# Altium PCB PCB2.PcbDoc (part 3 of 3)
Units mil, origin at the board's own origin, x right, y up, seen from the top; angles counter-clockwise.
Board outline 9010 x 4600 mil, 2 copper layers (Top Layer, Bottom Layer); 234 components, 289 nets, 937 pads, 186 vias.
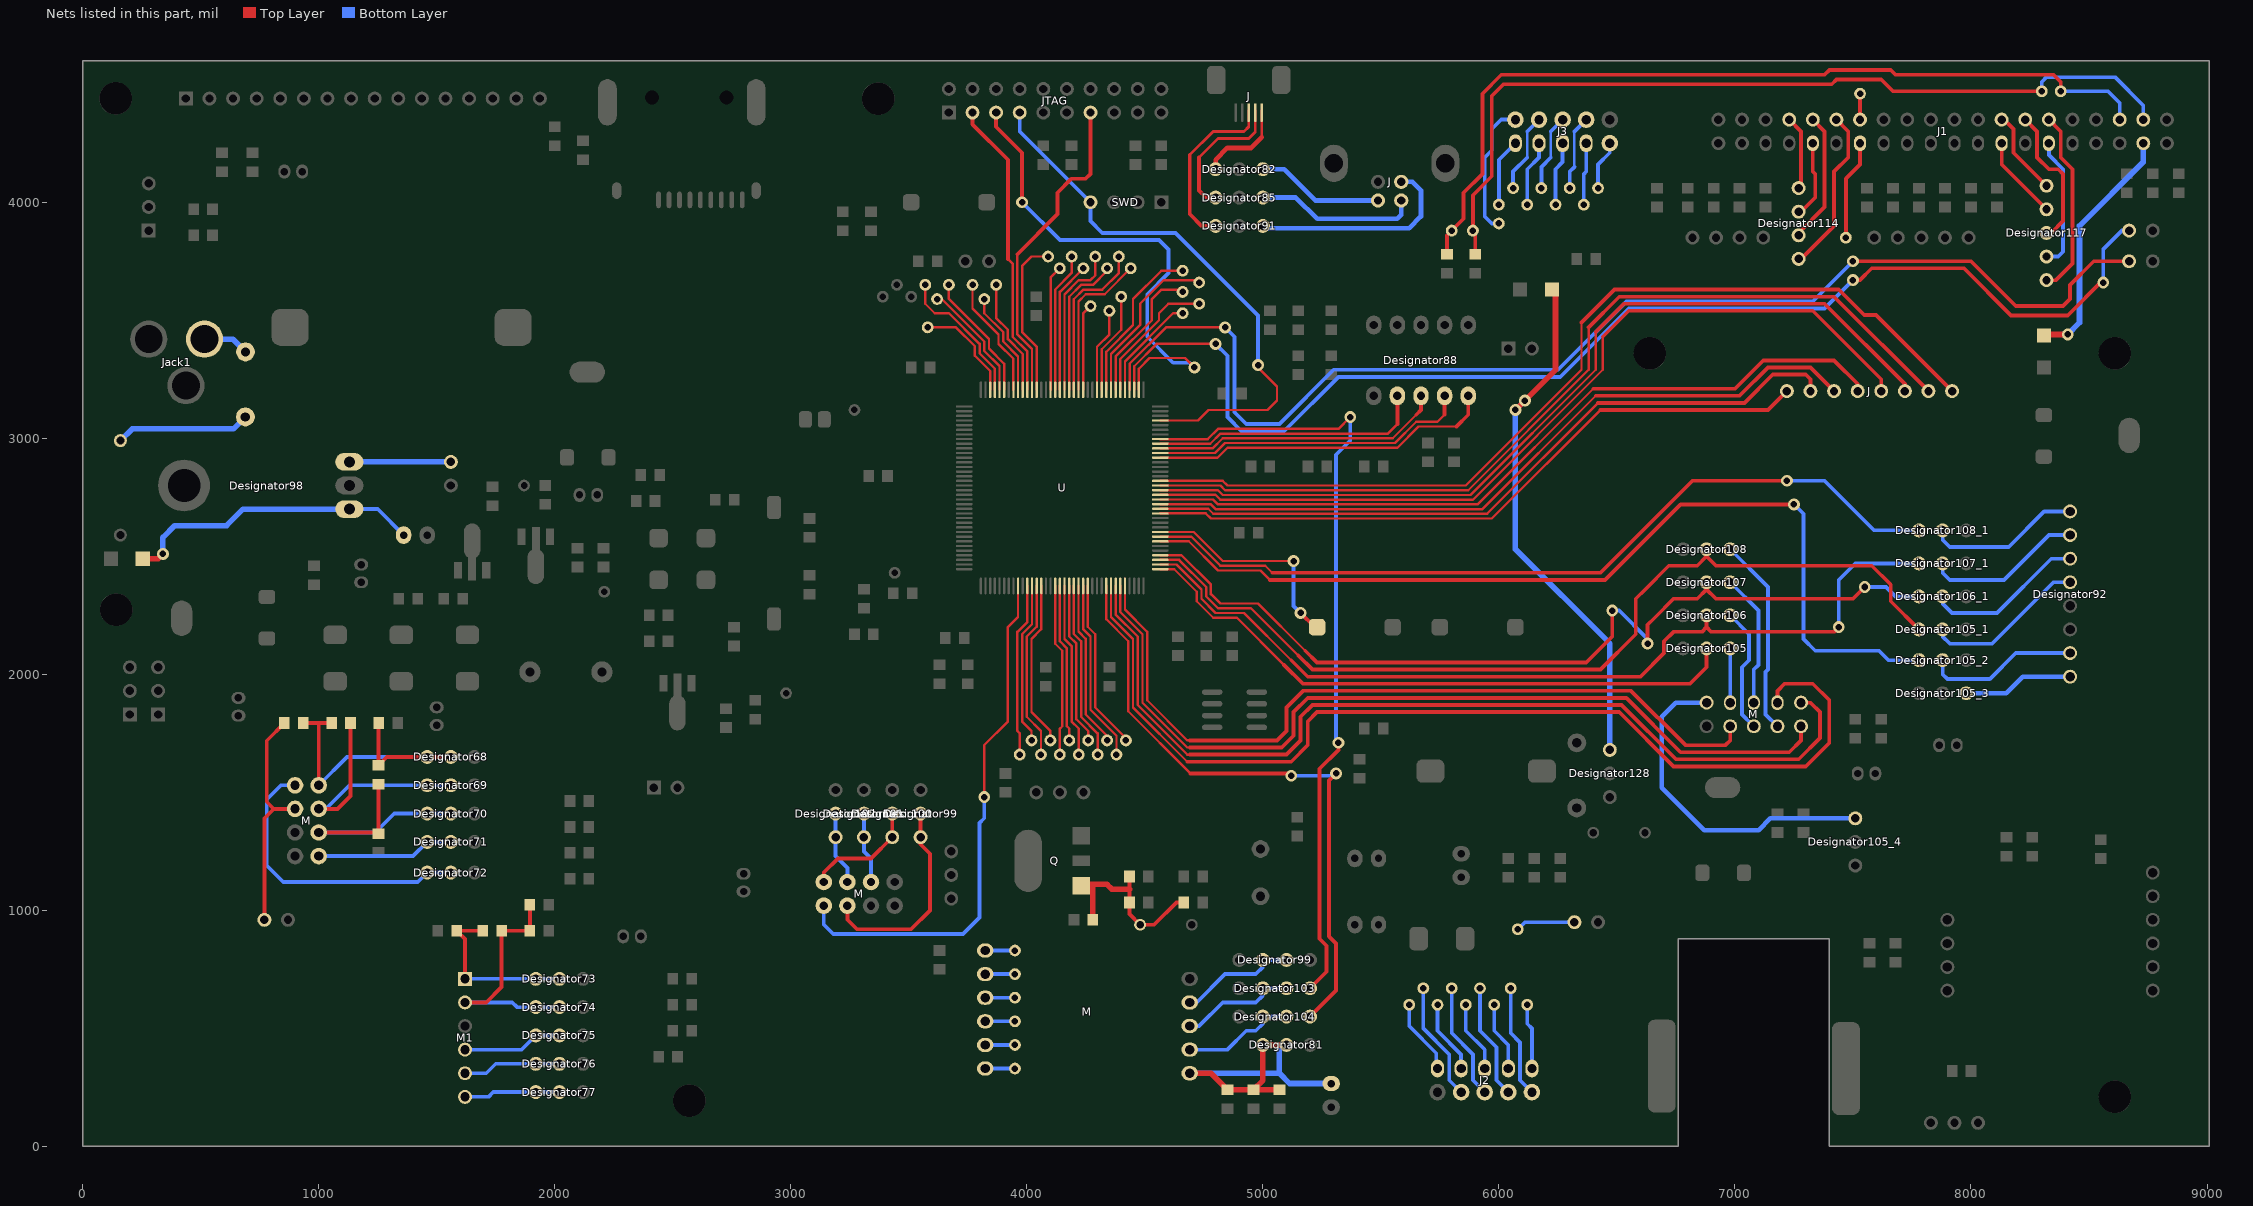
[diagram p3: the nets of this part, all layers, seen from the top]

## Via types
v1: diameter 50, hole 27.56, Top Layer to Bottom Layer, 186 vias

## Nets (pads, with @x,y where several pads share a name; then routed paths per layer and width w, separated by ;. In a path a pad name is that pad's centre, name@x,y a point inside that pad or via, vN(x,y) a via of type N, cw(c..) or ccw(c..) an arc to the next point about the centre after c; other vN are vias at no path point) (continued)
NewNet132: M.IRQ U.PC5 | length 2257.7
  Top Layer w10: v1(3820,1480) 3820,1700 3920,1800 3920,2200 3962.99,2242.99 U.PC5@3962.99,2374.65
  Bottom Layer w16: M.IRQ@3140,1020 3140,940 3180,900 3730,900 3800,970 3800,1370 3820,1390 v1(3820,1480)
NewNet133: pad.0@3970,1660 U.PB1 | length 736.3
  Top Layer w10: pad.0@3970,1660 3970,1750 3960,1760 3960,2180 4002.36,2222.36 U.PB1@4002.36,2374.65
NewNet134: pad.0@4020,1720 U.PB2 | length 688.6
  Top Layer w10: pad.0@4020,1720 4020,1760 3980,1800 3980,2170 4022.05,2212.05 U.PB2@4022.05,2374.65
NewNet135: pad.0@4060,1660 U.PF11 | length 756.8
  Top Layer w10: U.PF11@4041.73,2374.65 4041.73,2201.73 4000,2160 4000,1820 4060,1760 pad.0@4060,1660
NewNet136: pad.0@4100,1720 U.PF12 | length 704.9
  Top Layer w10: U.PF12@4061.42,2374.65 4061.42,2191.42 4020,2150 4020,1840 4100,1760 pad.0@4100,1720
NewNet137: pad.0@4140,1660 U.PF13 | length 731
  Top Layer w10: U.PF13@4120.47,2374.65 4120.47,2129.53 4150,2100 4150,1780 4140,1770 pad.0@4140,1660
NewNet138: pad.0@4180,1720 U.PF14 | length 671.1
  Top Layer w10: U.PF14@4140.16,2374.65 4140.16,2139.84 4170,2110 4170,1780 4180,1770 pad.0@4180,1720
NewNet139: pad.0@4220,1660 U.PF15 | length 739.6
  Top Layer w10: U.PF15@4159.84,2374.65 4159.84,2150.16 4190,2120 4190,1800 4220,1770 pad.0@4220,1660
NewNet140: pad.0@4260,1720 U.PG0 | length 688
  Top Layer w10: U.PG0@4179.53,2374.65 4179.53,2160.47 4210,2130 4210,1810 4260,1760 pad.0@4260,1720
NewNet141: pad.0@4300,1660 U.PG1 | length 756.4
  Top Layer w10: U.PG1@4199.21,2374.65 4199.21,2170.79 4230,2140 4230,1820 4300,1750 pad.0@4300,1660
NewNet142: pad.0@4340,1720 U.PE7 | length 704.8
  Top Layer w10: U.PE7@4218.9,2374.65 4218.9,2181.1 4250,2150 4250,1830 4340,1740 pad.0@4340,1720
NewNet143: pad.0@4380,1660 U.PE8 | length 773.2
  Top Layer w10: U.PE8@4238.58,2374.65 4238.58,2191.42 4270,2160 4270,1850 4380,1740 pad.0@4380,1660
NewNet144: pad.0@4420,1720 U.PE9 | length 725.8
  Top Layer w10: U.PE9@4258.27,2374.65 4258.27,2201.73 4290,2170 4290,1860 pad.0@4430,1720
NewNet145: Designator104.4 U.PE11 | length 2667.3
  Top Layer w10: U.PE11@4337.01,2374.65 4337.01,2232.99 4430,2140 4430,1843.94 4693.94,1580
  Top Layer w16: 4693.94,1580 5110,1580 v1(5120,1570) ; Designator104.4@5200,550 5310,660 5310,860 5280,890 5280,1550 v1(5310,1580)
  Bottom Layer w16: v1(5120,1570) 5300,1570 v1(5310,1580)
NewNet146: M.WOL U.PE12 | length 4372.2
  Top Layer w10: U.PE12@4356.69,2374.65 4356.69,2243.31 4450,2150 4450,1860 4680,1630
  Top Layer w16: 4680,1630 5120,1630 5190,1700 5190,1800 5230,1840 6510,1840 6740,1610 7300,1610 7400,1710 7400,1890 7330,1960 7210,1960 7180,1930 M.WOL@7180,1880
NewNet147: M.CLK U.PE13 | length 4005.1
  Top Layer w10: U.PE13@4376.38,2374.65 4376.38,2253.62 4470,2160 4470,1870 4680,1660 4690,1660
  Top Layer w16: 4690,1660 5100,1660 5160,1720 5160,1820 5210,1870 6520,1870 6750,1640 7270,1640 7360,1730 7360,1840 7320,1880 M.CLK@7280,1880
NewNet148: M.INT U.PE14 | length 3723.8
  Top Layer w10: U.PE14@4396.06,2374.65 4396.06,2263.94 4490,2170 4490,1880 4680,1690 4690,1690
  Top Layer w16: 4690,1690 5080,1690 5130,1740 5130,1840 5190,1900 6540,1900 6770,1670 7230,1670 7280,1720 M.INT@7280,1780
NewNet149: M.RST@6980,1780 U.PE15 | length 3403.6
  Top Layer w10: U.PE15@4415.75,2405.04 U.PE15@4415.75,2374.65 4415.75,2274.25 4510,2180 4510,1890 4680,1720 4690,1720
  Top Layer w16: 4690,1720 5060,1720 5100,1760 5100,1860 5170,1930 6560,1930 6790,1700 6960,1700 6980,1720 M.RST@6980,1780
NewNet150: Designator105.2 U.PB12-SPI2NSS | length 2648.2
  Top Layer w10: U.PB12-SPI2NSS@4565.35,2445.51 4624.49,2445.51 4720,2350 4720,2310 4790,2240 4890,2240 5090,2040
  Top Layer w16: 5090,2040 5170,1960 6810,1960 6880,2030 Designator105.2@6880,2110
NewNet151: Designator106.2 Designator107_1.1 U.PB13-SPI2-SCK | length 3836.7
  Top Layer w10: U.PB13-SPI2-SCK@4565.35,2465.2 4634.8,2465.2 4740,2360 4740,2320 4800,2260 4920,2260 5120,2060
  Top Layer w16: 5120,2060 5190,1990 6600,1990 6700,2090 6700,2140 6740,2180 6860,2180 6880,2200 ; Designator106.2@6880,2240 6880,2200 ; v1(7440,2200) 7420,2180 6900,2180 6880,2200
  Bottom Layer w16: v1(7440,2200) 7440,2400 7510,2470 Designator107_1.1@7780,2470
NewNet152: Designator106_1.1 Designator107.2 U.PB15-SPI2-MOSI | length 3877.6
  Top Layer w10: U.PB15-SPI2-MOSI@4565.35,2504.57 4655.43,2504.57 4780,2380 4780,2340 4820,2300 4980,2300 5180,2100
  Top Layer w16: 5180,2100 5230,2050 6370,2050 6480,2160 v1(6480,2270) ; v1(6630,2130) 6630,2210 6660,2240 6740,2320 6840,2320 6880,2360 ; Designator107.2@6880,2390 6880,2360 ; v1(7550,2370) 7500,2320 6920,2320 6880,2360
  Bottom Layer w16: v1(6480,2270) 6510,2270 6630,2150 v1(6630,2130) ; v1(7550,2370) 7640,2370 7680,2330 Designator106_1.1@7780,2330
NewNet153: Designator105_1.1 Designator108.2 U.PB14-SPI2-MISO | length 3916.7
  Top Layer w10: U.PB14-SPI2-MISO@4565.35,2484.88 4645.12,2484.88 4760,2370 4760,2330 4810,2280 4950,2280 5150,2080
  Top Layer w16: 5150,2080 5210,2020 6430,2020 6580,2170 6580,2180 6580,2320 6620,2360 6720,2460 6840,2460 6880,2500 ; Designator108.2@6880,2530 6880,2500 ; Designator105_1.1@7780,2190 7660,2310 7660,2380 7580,2460 6920,2460 6880,2500
NewNet154: Designator105_2.1 U.PD10 | length 3998.8
  Top Layer w10: U.PD10@4565.35,2563.62 4686.38,2563.62 4810,2440 4990,2440 5030,2400
  Top Layer w16: 5030,2400 6450,2400 6770,2720 v1(7250,2720)
  Bottom Layer w16: v1(7250,2720) 7290,2680 7290,2150 7340,2100 7610,2100 7650,2060 Designator105_2.1@7780,2060
NewNet155: Designator108_1.1 U.PD11 | length 3526.7
  Top Layer w10: U.PD11@4565.35,2583.31 4696.69,2583.31 4820,2460 5010,2460 5040,2430
  Top Layer w16: 5040,2430 6430,2430 6820,2820 v1(7220,2820)
  Bottom Layer w16: v1(7220,2820) 7380,2820 7590,2610 Designator108_1.1@7780,2610
NewNet156: KEY1.1 U.PD12 | length 942.9
  Top Layer w10: U.PD12@4565.35,2602.99 4707.01,2602.99 4830,2480 v1(5130,2480)
  Top Layer w16: v1(5160,2260) 5220,2200 KEY1.1@5230,2200
  Bottom Layer w16: v1(5130,2480) 5130,2290 v1(5160,2260)
NewNet157: J.Row1 U.PD14 | length 2887.3
  Top Layer w10: U.PD14@4565.35,2681.73 4758.27,2681.73 4780,2660 5970,2660 6430,3120
  Top Layer w16: 6430,3120 7140,3120 J.Row1@7220,3200
NewNet158: J.Row2 U.PD15 | length 3066.2
  Top Layer w10: U.PD15@4565.35,2701.42 4768.58,2701.42 4790,2680 5950,2680 6420,3150
  Top Layer w16: 6420,3150 7040,3150 7160,3270 7300,3270 7320,3250 J.Row2@7320,3200
NewNet159: J.Row3 U.PG2 | length 3153.3
  Top Layer w10: U.PG2@4565.35,2721.1 4778.9,2721.1 4800,2700 5930,2700 6410,3180
  Top Layer w16: 6410,3180 7020,3180 7140,3300 7320,3300 J.Row3@7420,3200
NewNet160: J.Row4 U.PG3 | length 3287.3
  Top Layer w10: U.PG3@4565.35,2740.79 4789.21,2740.79 4810,2720 5910,2720 6400,3210
  Top Layer w16: 6400,3210 7000,3210 7120,3330 7420,3330 7520,3230 J.Row4@7520,3200
NewNet161: J.Col1 U.PG4 | length 3646.6
  Top Layer w10: U.PG4@4565.35,2760.47 4799.53,2760.47 4820,2740 5890,2740 6440,3290 6440,3430
  Top Layer w16: 6440,3430 6550,3540 7330,3540 7620,3250 J.Col1@7620,3200
NewNet162: J.Col2 U.PG5 | length 3763.1
  Top Layer w10: U.PG5@4565.35,2780.16 4809.84,2780.16 4830,2760 5880,2760 6410,3290 6410,3450
  Top Layer w16: 6410,3450 6530,3570 7380,3570 7720,3230 J.Col2@7720,3200
NewNet163: J.Col3 U.PG6 | length 3873.6
  Top Layer w10: U.PG6@4565.35,2799.84 4820.16,2799.84 4840,2780 5870,2780 6380,3290 6380,3470
  Top Layer w16: 6380,3470 6510,3600 7420,3600 J.Col3@7820,3200
NewNet164: J.Col4 U.PG7 | length 4001.8
  Top Layer w10: U.PG7@4565.35,2819.53 4830.47,2819.53 4850,2800 5860,2800 6350,3290 6350,3490
  Top Layer w16: 6350,3490 6490,3630 7440,3630 7547.5,3522.5 7597.5,3522.5 J.Col4@7920,3200
NewNet165: Designator88.5 U.PC7 | length 1460.1
  Top Layer w10: U.PC7@4565.35,2917.95 4807.95,2917.95 4850,2960 5570,2960 5660,3050 5820,3050
  Top Layer w16: 5820,3050 5870,3100 Designator88.5@5870,3180
NewNet166: Designator88.6 U.PC8 | length 1351.9
  Top Layer w10: U.PC8@4565.35,2937.64 4797.64,2937.64 4840,2980 5560,2980 5650,3070 5740,3070 5770,3100
  Top Layer w16: 5770,3100 Designator88.6@5770,3180
NewNet167: Designator88.7 U.PC9 | length 1232
  Top Layer w10: U.PC9@4565.35,2957.32 4787.32,2957.32 4830,3000 5550,3000 5650,3100
  Top Layer w16: 5650,3100 5670,3120 Designator88.7@5670,3180
NewNet168: Designator88.8 U.PA8 | length 1159
  Top Layer w10: U.PA8@4565.35,2977.01 4777.01,2977.01 4820,3020 5530,3020 5570,3060
  Top Layer w16: 5570,3060 Designator88.8@5570,3180
NewNet169: Designator103.4 U.PA9-USART1-TX | length 3366.8
  Top Layer w10: U.PA9-USART1-TX@4565.35,2996.69 4766.69,2996.69 4810,3040 5320,3040 v1(5370,3090)
  Top Layer w16: Designator103.4@5200,670 5270,740 5270,850 5240,880 5240,1600 5320,1680 v1(5320,1710)
  Bottom Layer w16: v1(5320,1710) 5310,1720 5310,2930 5370,2990 v1(5370,3090)
NewNet170: JTAG.TMS-SWDIO SWD.SWDIO U.PA13-TMS-SWDIO | length 2382.8
  Top Layer w10: U.PA13-TMS-SWDIO@4565.35,3075.43 4725.43,3075.43 4770,3120 5020,3120 5060,3160 5060,3220 4980,3300 v1(4980,3310)
  Bottom Layer w16: JTAG.TMS-SWDIO@3970,4380 3970,4300 SWD.SWDIO@4270,4000 4270,3920 4320,3870 4630,3870 4980,3520 v1(4980,3310)
NewNet171: JTAG.TDI U.PA15-TDI | length 2149.5
  Top Layer w10: U.PA15-TDI@4474.8,3205.35 4474.8,3294.8 4520,3340 4670,3340 v1(4710,3300)
  Top Layer w16: JTAG.TDI@3870,4380 3870,4320 3980,4210 v1(3980,4000)
  Bottom Layer w16: v1(3980,4000) 4140,3840 4560,3840 4600,3800 4600,3700 4510,3610 4510,3430 4620,3320 4690,3320 v1(4710,3300)
NewNet172: Designator115.1 U.PC10-UART4-TX | length 5273.4
  Top Layer w10: U.PC10-UART4-TX@4455.12,3205.35 4455.12,3305.12 4550,3400 v1(4800,3400)
  Top Layer w16: v1(7500,3670) 7530,3670 7580,3720 7970,3720 8170,3520 8410,3520 8560,3670 v1(8560,3660)
  Bottom Layer w16: v1(4800,3400) 4850,3350 4850,3090 4910,3030 5090,3030 5320,3260 6260,3260 6550,3550 7380,3550 v1(7500,3670) ; v1(8560,3660) 8560,3800 8640,3880 Designator115.1@8670,3880
NewNet173: Designator116.1 U.PC11-UART4-RX | length 5244.3
  Top Layer w10: U.PC11-UART4-RX@4435.43,3205.35 4435.43,3315.43 4590,3470 v1(4840,3470)
  Top Layer w16: v1(7500,3750) 8000,3750 8190,3560 8390,3560 8420,3590 8420,3650 8520,3750 Designator116.1@8670,3750
  Bottom Layer w16: v1(4840,3470) 4880,3430 4880,3110 4930,3060 5070,3060 5300,3290 6250,3290 6540,3580 7330,3580 v1(7500,3750)
NewNet174: pad.0@4660,3530 U.PC12-UART5-TX | length 449.2
  Top Layer w10: U.PC12-UART5-TX@4415.75,3205.35 4415.75,3325.75 4620,3530 pad.0@4660,3530
NewNet175: pad.0@4730,3570 U.PD0 | length 579.1
  Top Layer w10: U.PD0@4396.06,3205.35 4396.06,3336.06 4560,3500 4560,3530 4600,3570 pad.0@4730,3570
NewNet176: pad.0@4660,3620 U.PD1 | length 594.8
  Top Layer w10: U.PD1@4376.38,3205.35 4376.38,3346.38 4530,3500 4530,3590 4570,3630 pad.0@4660,3630
NewNet177: pad.0@4730,3660 U.PD2-UART5-RX | length 707.1
  Top Layer w10: U.PD2-UART5-RX@4356.69,3205.35 4356.69,3356.69 4480,3480 4480,3570 4580,3670 pad.0@4730,3670
NewNet178: pad.0@4660,3710 U.PD3 | length 691.2
  Top Layer w10: U.PD3@4337.01,3205.35 4337.01,3367.01 4450,3480 4450,3590 4570,3710 pad.0@4660,3710
NewNet179: pad.0@4400,3600 U.PD4 | length 428.9
  Top Layer w10: U.PD4@4317.32,3205.35 4317.32,3377.32 4400,3460 pad.0@4400,3600
NewNet180: pad.0@4350,3540 U.PD5 | length 356.3
  Top Layer w10: U.PD5@4297.64,3205.35 4297.64,3387.64 4350,3440 pad.0@4350,3540
NewNet181: pad.0@4270,3560 U.PD6 | length 367.7
  Top Layer w10: U.PD6@4238.58,3205.35 4238.58,3528.58 pad.0@4270,3560
NewNet182: pad.0@4440,3720 U.PD7 | length 653.1
  Top Layer w10: U.PD7@4218.9,3205.35 4218.9,3578.9 4250,3610 4330,3610 pad.0@4440,3720
NewNet183: pad.0@4390,3770 U.PG9 | length 690.5
  Top Layer w10: U.PG9@4199.21,3205.35 4199.21,3589.21 4240,3630 4320,3630 4390,3700 pad.0@4390,3770
NewNet184: pad.0@4340,3720 U.PG10 | length 610.4
  Top Layer w10: U.PG10@4179.53,3205.35 4179.53,3599.53 4230,3650 4280,3650 4340,3710 pad.0@4340,3720
NewNet185: pad.0@4290,3770 U.PG11 | length 647.8
  Top Layer w10: U.PG11@4159.84,3205.35 4159.84,3609.84 4220,3670 4270,3670 4290,3690 pad.0@4290,3770
NewNet186: pad.0@4240,3720 U.PG12 | length 556
  Top Layer w10: U.PG12@4140.16,3205.35 4140.16,3620.16 pad.0@4240,3720
NewNet187: pad.0@4190,3770 U.PG13 | length 593.4
  Top Layer w10: U.PG13@4120.47,3205.35 4120.47,3630.47 4190,3700 pad.0@4190,3770
NewNet188: pad.0@4140,3720 U.PG14 | length 530.9
  Top Layer w10: U.PG14@4100.79,3205.35 4100.79,3680.79 pad.0@4140,3720
NewNet189: pad.0@4090,3770 U.PG15 | length 676.8
  Top Layer w10: U.PG15@4041.73,3205.35 4041.73,3388.27 3980,3450 3980,3730 4020,3770 pad.0@4090,3770
NewNet190: JTAG.TDO U.PB3-TDO | length 1363.9
  Top Layer w10: 3960,3780 3960,3440 4022.05,3377.95 U.PB3-TDO@4022.05,3205.35
  Top Layer w16: 3960,3780 4130,3950 4130,4040 4190,4100 4250,4100 4270,4120 JTAG.TDO@4270,4380
NewNet191: JTAG.TRST U.PB4-NJTRST | length 1270.9
  Top Layer w10: 3920,3760 3940,3740 3940,3430 4002.36,3367.64 U.PB4-NJTRST@4002.36,3205.35
  Top Layer w16: JTAG.TRST@3770,4380 3770,4330 3920,4180 3920,3760
NewNet192: pad.0@3870,3650 U.PB5 | length 491.3
  Top Layer w10: pad.0@3870,3650 3870,3510 3920,3460 3920,3420 3982.68,3357.32 U.PB5@3982.68,3205.35
NewNet193: pad.0@3820,3590 U.PB6 | length 443.9
  Top Layer w10: pad.0@3820,3590 3820,3530 3900,3450 3900,3410 3962.99,3347.01 U.PB6@3962.99,3205.35
NewNet194: pad.0@3770,3650 U.PB7 | length 516.4
  Top Layer w10: pad.0@3770,3650 3770,3550 3880,3440 3880,3400 3943.31,3336.69 U.PB7@3943.31,3205.35
NewNet195: pad.0@3670,3650 U.PB8-I2C1SCL | length 541.5
  Top Layer w10: pad.0@3670,3650 3670,3590 3840,3420 3840,3380 3903.94,3316.06 U.PB8-I2C1SCL@3903.94,3205.35
NewNet196: pad.0@3620,3590 U.PB9-I2C1SDA | length 505.8
  Top Layer w10: pad.0@3620,3590 3640,3590 3820,3410 3820,3370 3884.25,3305.75 U.PB9-I2C1SDA@3884.25,3205.35
NewNet197: pad.0@3570,3650 U.PE0 | length 601.8
  Top Layer w10: pad.0@3570,3650 3570,3570 3610,3530 3670,3530 3800,3400 3800,3360 3864.57,3295.43 U.PE0@3864.57,3205.35
NewNet198: pad.0@3580,3470 U.PE1 | length 444.7
  Top Layer w10: pad.0@3580,3470 3700,3470 3780,3390 3780,3350 3844.88,3285.12 U.PE1@3844.88,3205.35
NewNet199: C6.0@4280,960 Designator97.0 Q.B R21.0@4434.88,1033.86 R22.0@4434.88,1143.86 R24.0@4664.88,1033.86 | length 790.9
  Top Layer w16: R22.0@4434.88,1143.86 4434.88,1090 R21.0@4434.88,1033.86 4434.88,984.12 Designator97.0@4480,939 4539,939 4633.86,1033.86 R24.0@4664.88,1033.86
  Top Layer w24: Q.B@4250,1110 4280,1110 ; C6.0@4280,960 4280,1110 ; 4434.88,1090 4360,1090 4340,1110 4280,1110
NewNet200: Designator82.1 J.Vcc | length 389.4
  Top Layer w12: 4995.12,4275.12 J.Vcc@4995.12,4380 J.Vcc@4995.12,4390
  Top Layer w20: Designator82.1@4800,4140 4800,4180 4850,4230 4950,4230 4995.12,4275.12
NewNet201: Designator85.1 J.D-@4967.56,4380 | length 597
  Top Layer w12: 4730,4190 4810,4270 4940,4270 4967.56,4297.56 J.D-@4967.56,4380 J.D-@4967.56,4390
  Top Layer w16: 4730,4190 4730,4050 4760,4020 Designator85.1@4800,4020
NewNet202: Designator91.1 J.D+@4940,4380 | length 750.4
  Top Layer w12: 4690,4200 4790,4300 4920,4300 4940,4320 J.D+@4940,4380 J.D+@4940,4390
  Top Layer w16: 4690,4200 4690,3950 4740,3900 Designator91.1@4800,3900
NewNet203: Designator55.1 M.GPIO0 R14.0@854.88,1793.86 | length 983.9
  Top Layer w16: Designator55.1@770,960 770,1390 810,1430 ; R14.0@854.88,1793.86 780,1718.98 780,1460 810,1430 ; M.GPIO0@900,1430 810,1430
NewNet204: C.0@1254.88,1793.86 Designator68.1 Designator68.2 M.3.3V R14.0@934.88,1793.86 R15.0@1054.88,1793.86 R16.0@1253.86,1615.12 | length 1394.9
  Top Layer w16: R14.0@934.88,1793.86 996.14,1793.86 ; M.3.3V@1000,1530 1000,1790 996.14,1793.86 ; R15.0@1054.88,1793.86 996.14,1793.86 ; C.0@1254.88,1793.86 1253.86,1792.83 R16.0@1253.86,1615.12 1288.74,1650 Designator68.1@1460,1650 Designator68.2@1560,1650
  Bottom Layer w16: M.3.3V@1000,1530 1120,1650 Designator68.1@1460,1650
NewNet205: Designator69.1 Designator69.2 M.RST@1000,1430 R15.0@1134.88,1793.86 | length 1068
  Top Layer w16: M.RST@1000,1430 1080,1430 1134.88,1484.88 R15.0@1134.88,1793.86
  Bottom Layer w16: M.RST@1000,1430 1030,1430 1130,1530 1350,1530 Designator69.1@1460,1530 Designator69.2@1560,1530
NewNet206: Designator70.1 Designator70.2 M.CH_PD R16.0@1253.86,1535.12 R17.0@1253.86,1325.12 | length 1052.1
  Top Layer w16: M.CH_PD@1000,1330 1253.86,1330 R16.0@1253.86,1535.12
  Bottom Layer w16: M.CH_PD@1000,1330 1240,1330 1320,1410 Designator70.1@1460,1410 Designator70.2@1560,1410
NewNet207: 
NewNet208: Designator73.1 Designator73.2 M1.En R18.0@1584.88,913.86 R19.0@1694.88,913.86 | length 728.4
  Top Layer w16: M1.En@1620,710 1620,878.74 R18.0@1584.88,913.86 R19.0@1694.88,913.86
  Bottom Layer w16: M1.En@1620,710 Designator73.1@1920,710 Designator73.2@2020,710
NewNet209: C1.0@1894.88,913.86 C2.0@1894.88,1023.86 Designator74.1 Designator74.2 M1.5V R19.0@1774.88,913.86 | length 1059
  Top Layer w16: M1.5V@1620,610 1710,610 1774.88,674.88 R19.0@1774.88,913.86 C1.0@1894.88,913.86 C2.0@1894.88,1023.86
  Bottom Layer w16: M1.5V@1620,610 1820,610 1840,590 Designator74.1@1920,590 Designator74.2@2020,590
NewNet210: C3.0@4850,240 C4.0@4960,240 C5.0@5070,240 C14.2 Designator81.1 Designator81.2 M.Vcc | length 1553
  Top Layer w24: M.Vcc@4690,310 4780,310 C3.0@4850,240 C4.0@4960,240 ; C5.0@5070,240 C4.0@4960,240 ; Designator81.2@5100,430 Designator81.1@5000,430 5000,280 C4.0@4960,240
  Bottom Layer w24: M.Vcc@4690,310 5070,310 ; Designator81.1@5000,430 5070,430 ; Designator81.2@5100,430 5070,430 ; C14.2@5289.33,266.34 5113.66,266.34 5070,310 ; 5070,310 5070,430
NewNet211: Designator61.2 Designator98.3 | length 430
  Bottom Layer w24: Designator98.3@1130,2900 1260,2900 Designator61.2@1560,2900
NewNet212: Designator128.3 F1.2 | length 2248.9
  Top Layer w24: v1(6070,3120) v1(6110,3160) 6240,3290 6240,3480 6240,3615 F1.2@6225,3630
  Bottom Layer w24: v1(6110,3160) v1(6070,3120) 6070,2530 6470,2130 Designator128.3@6470,1680
NewNet213: F2.2 J1.5v@8730,4250 | length 1044.6
  Top Layer w24: F2.2@8310,3435 8315,3440 v1(8410,3440)
  Bottom Layer w24: v1(8410,3440) 8460,3490 8460,3900 8730,4170 J1.5v@8730,4250
NewNet214: Designator60.1 pad.0@6080,920 | length 252.4
  Bottom Layer w16: pad.0@6080,920 6110,950 Designator60.1@6320,950
NewNet215: Designator105_4.3 M.VCC3.3v | length 1430.1
  Bottom Layer w20: M.VCC3.3v@6880,1880 6750,1880 6690,1820 6690,1520 6870,1340 7100,1340 7150,1390 Designator105_4.3@7510,1390
NewNet216: Designator92.Vcc3.3V Designator105_3.3 | length 469
  Bottom Layer w20: Designator105_3.3@7980,1920 8150,1920 8220,1990 Designator92.Vcc3.3V@8420,1990
NewNet217: C37.2 Designator98.1 F3.2 | length 1278.6
  Top Layer w24: F3.2@255,2490 320,2490 v1(340,2510)
  Bottom Layer w16: Designator98.1@1130,2700 1250,2700 C37.2@1360,2590
  Bottom Layer w24: v1(340,2510) 340,2580 390,2630 610,2630 680,2700 Designator98.1@1130,2700
NewNet218: Designator89.K R.2 | length 571.2
  Bottom Layer w24: R.2@160,2990 210,3040 639.17,3040 Designator89.K@689.57,3090.4
NewNet219: Designator117.5 J1.GPIO22 | length 374.6
  Top Layer w16: J1.GPIO22@8130,4350 8140,4350 8180,4310 8180,4210 Designator117.5@8320,4070
  Bottom Layer w16: J1.GPIO22@8130,4340 J1.GPIO22@8130,4350
NewNet220: Designator117.4 J1.GPIO23 | length 358.7
  Top Layer w16: J1.GPIO23@8130,4250 8130,4160 Designator117.4@8320,3970
NewNet221: Designator117.3 J1.GPIO27 | length 610.4
  Top Layer w16: J1.GPIO27@8230,4350 8280,4300 8280,4190 8330,4140 8370,4140 8390,4120 8390,3920 8340,3870 Designator117.3@8320,3870
NewNet222: Designator117.2 J1.GPIO18 | length 573.1
  Top Layer w16: J1.GPIO18@8330,4240 J1.GPIO18@8330,4250
  Bottom Layer w16: Designator117.2@8320,3770 8370,3770 8390,3790 8390,4140 8330,4200 J1.GPIO18@8330,4250
NewNet223: Designator117.1 J1.GPIO17 | length 790.4
  Top Layer w16: Designator117.1@8320,3670 8360,3670 8430,3740 8430,4140 8380,4190 8380,4300 J1.GPIO17@8330,4350
NewNet224: Designator114.4 J1.GPIO13 | length 314.9
  Top Layer w16: J1.GPIO13@7230,4350 7280,4300 7280,4070 Designator114.4@7270,4060
NewNet225: Designator114.3 J1.GPIO12 | length 329
  Top Layer w16: Designator114.3@7270,3960 7280,3960 7340,4020 7340,4120 7330,4130 J1.GPIO12@7330,4250
NewNet226: Designator114.2 J1.GPIO6 | length 556.3
  Top Layer w16: Designator114.2@7270,3860 7270,3870 7380,3980 7380,4300 J1.GPIO6@7330,4350
NewNet227: Designator114.1 J1.GPIO5 | length 703.6
  Top Layer w16: Designator114.1@7270,3760 7280,3760 7420,3900 7420,4130 7480,4190 7480,4300 J1.GPIO5@7430,4350
NewNet228: Designator92.RST Designator105_2.2 | length 653.8
  Bottom Layer w16: Designator105_2.2@7880,2060 7880,2000 7900,1980 8080,1980 8190,2090 Designator92.RST@8420,2090
NewNet229: Designator101.1 Designator101.2 M.CE | length 302.4
  Bottom Layer w16: Designator101.2@3310,1410 Designator101.1@3310,1310 3310,1250 3340,1220 M.CE@3340,1120
NewNet230: Designator102.1 Designator102.2 M.SCK@3240,1120 | length 310.7
  Bottom Layer w16: Designator102.2@3190,1410 Designator102.1@3190,1310 3190,1230 3240,1180 M.SCK@3240,1120
NewNet231: Designator100.1 Designator100.2 M.MISO | length 492.1
  Top Layer w16: M.MISO@3140,1120 3140,1160 3200,1220 3340,1220 Designator100.1@3430,1310 Designator100.2@3430,1410
NewNet232: Designator99.1@3550,1310 Designator99.2@3550,1410 M.MOSI | length 906.3
  Top Layer w16: M.MOSI@3240,1020 3240,960 3280,920 3510,920 3590,1000 3590,1240 3550,1280 Designator99.1@3550,1310 Designator99.2@3550,1410 Designator99.2@3570,1410
NewNet233: Designator91.3 J.D+@5586.3,4086.3 | length 889.4
  Bottom Layer w20: Designator91.3@5010,3890 5620,3890 5670,3940 5670,4050 5633.7,4086.3 J.D+@5586.3,4086.3
NewNet234: Designator85.3 J.D-@5586.3,4007.56 | length 691.6
  Bottom Layer w20: Designator85.3@5000,4020 5140,4020 5230,3930 5570,3930 5586.3,3946.3 J.D-@5586.3,4007.56
NewNet235: Designator82.3 J.vcc@5487.87,4007.56 | length 542.7
  Bottom Layer w20: Designator82.3@5000,4140 5090,4140 5222.44,4007.56 J.vcc@5487.87,4007.56
NewNet236: J3.2 pad.0@6420,4060 | length 210.7
  Bottom Layer w16: pad.0@6420,4060 6420,4160 6470,4210 J3.2@6470,4250
NewNet237: J3.6 pad.0@6240,3990 | length 272.4
  Bottom Layer w16: pad.0@6240,3990 6240,4140 6270,4170 J3.6@6270,4250
NewNet238: J3.10 pad.0@6000,3990 | length 289
  Bottom Layer w16: pad.0@6000,3990 6000,4180 J3.10@6070,4250
NewNet239: J3.9 pad.0@6000,3910 | length 556.4
  Bottom Layer w16: pad.0@6000,3910 5970,3910 5940,3940 5940,4190 5970,4220 5970,4310 6010,4350 J3.9@6055,4350
NewNet240: J3.8 pad.0@6120,3990 | length 280.7
  Bottom Layer w16: pad.0@6120,3990 6120,4140 6170,4190 J3.8@6170,4250
NewNet241: J3.7 pad.0@6060,4060 | length 335.6
  Bottom Layer w10: 6120,4190 6120,4300
  Bottom Layer w16: pad.0@6060,4060 6060,4130 6120,4190 ; 6120,4300 J3.7@6170,4350
NewNet242: J3.5 pad.0@6180,4060 | length 327.3
  Bottom Layer w10: 6220,4190 6220,4300
  Bottom Layer w16: pad.0@6180,4060 6180,4150 6220,4190 ; 6220,4300 J3.5@6270,4350
NewNet243: J3.4 pad.0@6360,3990 | length 264.1
  Bottom Layer w16: pad.0@6360,3990 6360,4120 6370,4130 J3.4@6370,4250
NewNet244: J3.3 pad.0@6300,4060 | length 319
  Bottom Layer w10: 6320,4150 6320,4300
  Bottom Layer w16: pad.0@6300,4060 6300,4130 6320,4150 ; 6320,4300 J3.3@6370,4350
NewNet245: J2.5V pad.0@5620,600 | length 317.6
  Bottom Layer w16: pad.0@5620,600 5620,510 5735,395 J2.5V@5735,330
NewNet246: J2.6 pad.0@5860,600 | length 303.1
  Bottom Layer w16: pad.0@5860,600 5860,490 5940,410 J2.6@5940,330
NewNet247: J2.10 pad.0@6120,600 | length 278.3
  Bottom Layer w16: pad.0@6120,600 6120,520 6140,500 J2.10@6140,330
NewNet248: J2.9 pad.0@6050,670 | length 487.3
  Bottom Layer w16: pad.0@6050,680 pad.0@6050,670 6050,480 6090,440 6090,280 J2.9@6140,230
NewNet249: J2.8 pad.0@5980,600 | length 294.9
  Bottom Layer w16: pad.0@5980,600 5980,490 6040,430 J2.8@6040,330
NewNet250: J2.7 pad.0@5920,670 | length 489.7
  Bottom Layer w16: pad.0@5920,670 5920,490 5990,420 5990,280 J2.7@6040,230
NewNet251: J2.5 pad.0@5800,670 | length 498
  Bottom Layer w16: pad.0@5800,670 5800,480 5890,390 5890,280 J2.5@5940,230
NewNet252: J2.4 pad.0@5740,600 | length 315.6
  Bottom Layer w16: pad.0@5730,600 5740,590 5740,490 5840,390 J2.4@5840,330
NewNet253: J2.3.3V pad.0@5680,670 | length 506.3
  Bottom Layer w16: pad.0@5680,670 5680,500 5790,390 5790,280 J2.3.3V@5840,230
NewNet254: Designator89.A Jack1.1 | length 196.1
  Bottom Layer w24: Jack1.1@516.22,3420 636,3420 Designator89.A@690,3366
NewNet255: Designator92.MISO Designator105_1.2 | length 690.1
  Bottom Layer w16: Designator105_1.2@7880,2190 7880,2160 7910,2130 8090,2130 8350,2390 Designator92.MISO@8420,2390
NewNet256: Designator92.MOSI Designator106_1.2 | length 681.8
  Bottom Layer w16: Designator106_1.2@7880,2330 7880,2300 7920,2260 8110,2260 8340,2490 Designator92.MOSI@8420,2490
NewNet257: Designator92.SCK Designator107_1.2 | length 681.1
  Bottom Layer w16: Designator107_1.2@7880,2470 7880,2430 7910,2400 8140,2400 8330,2590 Designator92.SCK@8420,2590 Designator92.SCK@8430,2590
NewNet258: Designator92.CS Designator108_1.2 | length 654.6
  Bottom Layer w16: Designator108_1.2@7880,2610 7880,2570 7910,2540 8160,2540 8310,2690 Designator92.CS@8420,2690
NewNet259: Designator99.2@5000,790 Designator99.3@5100,790 M.TXD@4690,610 | length 502.1
  Bottom Layer w16: M.TXD@4690,610 4720,610 4840,730 4970,730 5000,760 Designator99.2@5000,790 Designator99.3@5100,790
NewNet260: Designator103.2 Designator103.3 M.RXD@4690,510 | length 503.8
  Bottom Layer w16: M.RXD@4680,510 M.RXD@4690,510 4730,510 4830,610 4970,610 5000,640 Designator103.2@5000,670 Designator103.3@5100,670
NewNet261: Designator104.2 Designator104.3 M.RST@4690,410 | length 505.6
  Bottom Layer w16: M.RST@4690,410 4850,410 4930,490 4970,490 5000,520 Designator104.2@5000,550 Designator104.3@5100,550 Designator104.3@5100,530
NewNet262: M.DTR pad.0@3950,330 | length 126.1
  Bottom Layer w16: M.DTR@3823.86,330 pad.0@3950,330
NewNet263: M.0@3823.86,430 pad.0@3950,430 | length 126.1
  Bottom Layer w16: M.0@3823.86,430 pad.0@3950,430
NewNet264: M.0@3823.86,530 pad.0@3950,530 | length 126.1
  Bottom Layer w16: M.0@3823.86,530 pad.0@3950,530
NewNet265: M.0@3823.86,630 pad.0@3950,630 | length 126.1
  Bottom Layer w16: M.0@3823.86,630 pad.0@3950,630
NewNet266: M.0@3823.86,730 pad.0@3950,730 | length 126.1
  Bottom Layer w16: M.0@3823.86,730 pad.0@3950,730
NewNet267: M.0@3823.86,830 pad.0@3950,830 | length 126.1
  Bottom Layer w16: M.0@3823.86,830 pad.0@3950,830
NewNet268: Designator108.3 M.SO | length 841.1
  Bottom Layer w16: Designator108.3@6980,2530 7140,2370 7140,2020 7130,2010 7130,1830 M.SO@7180,1780
NewNet269: Designator107.3 M.SI | length 568
  Bottom Layer w16: Designator107.3@6980,2390 7100,2270 7100,2040 7080,2020 M.SI@7080,1880
NewNet270: Designator106.3 M.SCK@7080,1780 | length 536.3
  Bottom Layer w16: Designator106.3@6980,2250 7060,2170 7060,2060 7030,2030 7030,1830 M.SCK@7080,1780
NewNet271: Designator105.3 M.CS | length 230
  Bottom Layer w16: M.CS@6980,1880 Designator105.3@6980,2110
NewNet272: Designator77.1 Designator77.2 M1.State | length 448.3
  Top Layer w16: M1.State@1620,190 M1.State@1620,210
  Bottom Layer w16: M1.State@1620,210 1720,210 1740,230 Designator77.1@1920,230 Designator77.2@2020,230 Designator77.2@2020,210
NewNet273: Designator76.1 Designator76.2 M1.RXD | length 416.6
  Bottom Layer w16: M1.RXD@1620,310 1710,310 1750,350 Designator76.1@1920,350 Designator76.2@2020,350
NewNet274: Designator75.1 Designator75.2 M1.TXD | length 444.9
  Bottom Layer w16: M1.TXD@1620,410 1860,410 Designator75.1@1920,470 Designator75.2@2020,470 Designator75.2@2020,450
NewNet275: Designator71.1 Designator71.2 M.TXD@1000,1230 | length 599
  Bottom Layer w16: M.TXD@1010,1220 M.TXD@1000,1230 1400,1230 Designator71.1@1460,1290 Designator71.2@1560,1290
NewNet276: Designator72.1 Designator72.2 M.RXD@900,1530 | length 1250.4
  Bottom Layer w16: M.RXD@900,1530 840,1530 780,1470 780,1190 850,1120 1420,1120 Designator72.1@1460,1160 Designator72.2@1560,1160
NewNet277: J1.GPIO2-SDA pad.0@5890,3880 pad.0@8300,4470 R36_20.0@5900,3780 | length 3675
  Top Layer w16: R36_20.0@5900,3780 5900,3870 pad.0@5890,3880 5890,4030 5970,4110 5970,4450 6020,4500 7410,4500 7430,4520 7620,4520 7670,4470 pad.0@8300,4470
  Bottom Layer w16: pad.0@8300,4470 8300,4510 8320,4530 8610,4530 8730,4410 J1.GPIO2-SDA@8730,4350
NewNet278: J1.GPIO3-SCL pad.0@8380,4470 pad.1@5800,3880 R36_21.0@5780,3780 | length 3635
  Top Layer w16: R36_21.0@5780,3780 5780,3860 pad.1@5800,3880 5850,3930 5850,4040 5930,4120 5930,4460 6010,4540 7380,4540 7400,4560 7660,4560 7680,4540 8350,4540 8380,4510 pad.0@8380,4470
  Bottom Layer w16: pad.0@8380,4470 8580,4470 8630,4420 J1.GPIO3-SCL@8630,4350
NewNet279: J1.ID_SD pad.0@7530,4460 | length 110
  Top Layer w16: J1.ID_SD@7530,4350 pad.0@7530,4460
NewNet280: J1.ID_SC pad.0@7470,3850 | length 424.9
  Top Layer w16: pad.0@7470,3850 7470,4100 7530,4160 J1.ID_SC@7530,4250
pads on no net: Designator56.0@2223.46,4423.39 Designator56.0@2262.83,4049.37 Designator56.0@2853.39,4049.37 Designator56.1 Designator56.2 Designator56.NC Designator56.Tamper Designator88.0 Designator88.1 Designator88.2 Designator88.3 Designator88.4 Designator88.9 Designator92.IRQ Designator94.D0 Designator94.D1 Designator95.1 Designator95.NC Designator96.3 Designator105_3.1 Designator105_4.1 Designator105_5.1 J1.3.3v J1.5v@8830,4250 J1.GPIO25 J.ID Jack1.2 M.GPIO2 U.NC

## Polygon pours and split planes (outlines as drawn)
Ground on Bottom Layer "gnd_poly" (solid, remove dead copper, pour order 2): 3.59,3.05 3.59,4603.05 8993.59,4603.05 8993.59,3.05 3.59,3.05 3.59,4603.05

## Keep-outs
Keep-Out Layer:
  the board outline again, w10

## Silkscreen, mask and mechanical layers (free items; w line width, h text height)
Top Overlay:
  circle w20: c140.39,2274.02 r106.3
  circle w20: c142.05,4439.37 r106.3
  circle w20: c3370.39,4439.37 r106.3
  circle w20: c6640,3360 r106.3
  circle w20: c8610,3360 r106.3
  circle w20: c8610,210 r106.3
  circle w20: c2570.39,194.02 r106.3
  lines w10: 6760,890 6760,1780 6830,1780 ; 7330,1780 7400,1780 7400,890 ; 7960,610 8710,610
  text "1" at 4790,4220 h60
  text "2" at 4980,4220 h60
  text "+5v" at 90,4060 h45
  text "G13" at 7340,4040 h45
  text "G22" at 8400,4040 h45
  text "out" at 100,3960 h45
  text "G23" at 8400,3950 h45
  text "G12" at 7340,3940 h45
  text "Gnd" at 90,3850 h45
  text "G27" at 8400,3850 h45
  text "RX" at 8890,3850 h45 r90
  text "G6" at 7340,3840 h45
  text "TX" at 8600,3840 h45 r90
  text "G18" at 8400,3750 h45
  text "G5" at 7340,3740 h45
  text "RX" at 8600,3710 h45 r90
  text "TX" at 8890,3710 h45 r90
  text "SCK" at 6840,3650 h45 r90
  text "CS0" at 7040,3650 h45 r90
  text "CS1" at 7610,3650 h45 r90
  text "CS0" at 7710,3650 h45 r90
  text "SCK" at 7820,3650 h45 r90
  text "G17" at 8400,3650 h45
  text "MOSI" at 6950,3620 h45 r90
  text "MISO" at 7140,3620 h45 r90
  text "MISO" at 7910,3620 h45 r90
  text "MOSI" at 8010,3620 h45 r90
  text "uC" at 8690,3590 h45 r90
  text "rPi" at 8800,3570 h45 r90
  text "uC" at 7800,2690 h50 r90
  text "Mod" at 7900,2690 h50 r90
  text "rPi" at 8000,2690 h50 r90
  text "rPi" at 6800,2610 h50 r90
  text "uC(SPI2)" at 6900,2610 h50 r90
  text "Mod" at 7010,2610 h50 r90
  text "In" at 50,2010 h40
  text "3.3v" at 390,2010 h40
  text "Out" at 30,1910 h40
  text "5v" at 400,1910 h40
  text "Gnd" at 20,1810 h40
  text "Gnd" at 400,1810 h40
  text "On" at 7910,1800 h50
  text "On" at 1570,1720 h50
  text "USB" at 6560,1660 h50
  text "rPi" at 6560,1460 h50
  text "On" at 3100,1420 h50 r90
  text "On" at 7720,1310 h50 r90
  text "On" at 3800,1040 h50 r90
  text "uC" at 5230,880 h50 r90
  text "rPi" at 4930,870 h50 r90
  text "Mod" at 4990,860 h50
  text "On" at 5120,320 h40
  text "On" at 7940,180 h60
  text "On" at 2040,100 h50

## Text inside footprints (layer, text, board x,y; h text height)
J1: Top Overlay "39" at 6770,4330 h50; Top Overlay "40" at 6770,4220 h50; Top Overlay "2" at 8910,4230 h50; Top Overlay "1" at 8920,4330 h50
JTAG: Top Overlay "1" at 3570,4360 h50